# Altium PCB top_board_rev10.PcbDoc
Units mm, origin at the board's own origin, x right, y up, seen from the top; angles counter-clockwise.
Board outline 109 x 70 mm, 4 copper layers (Top Layer, +12V, -12V, Bottom Layer), stack 0.603 mm thick; 89 components, 70 nets, 330 pads, 126 vias.
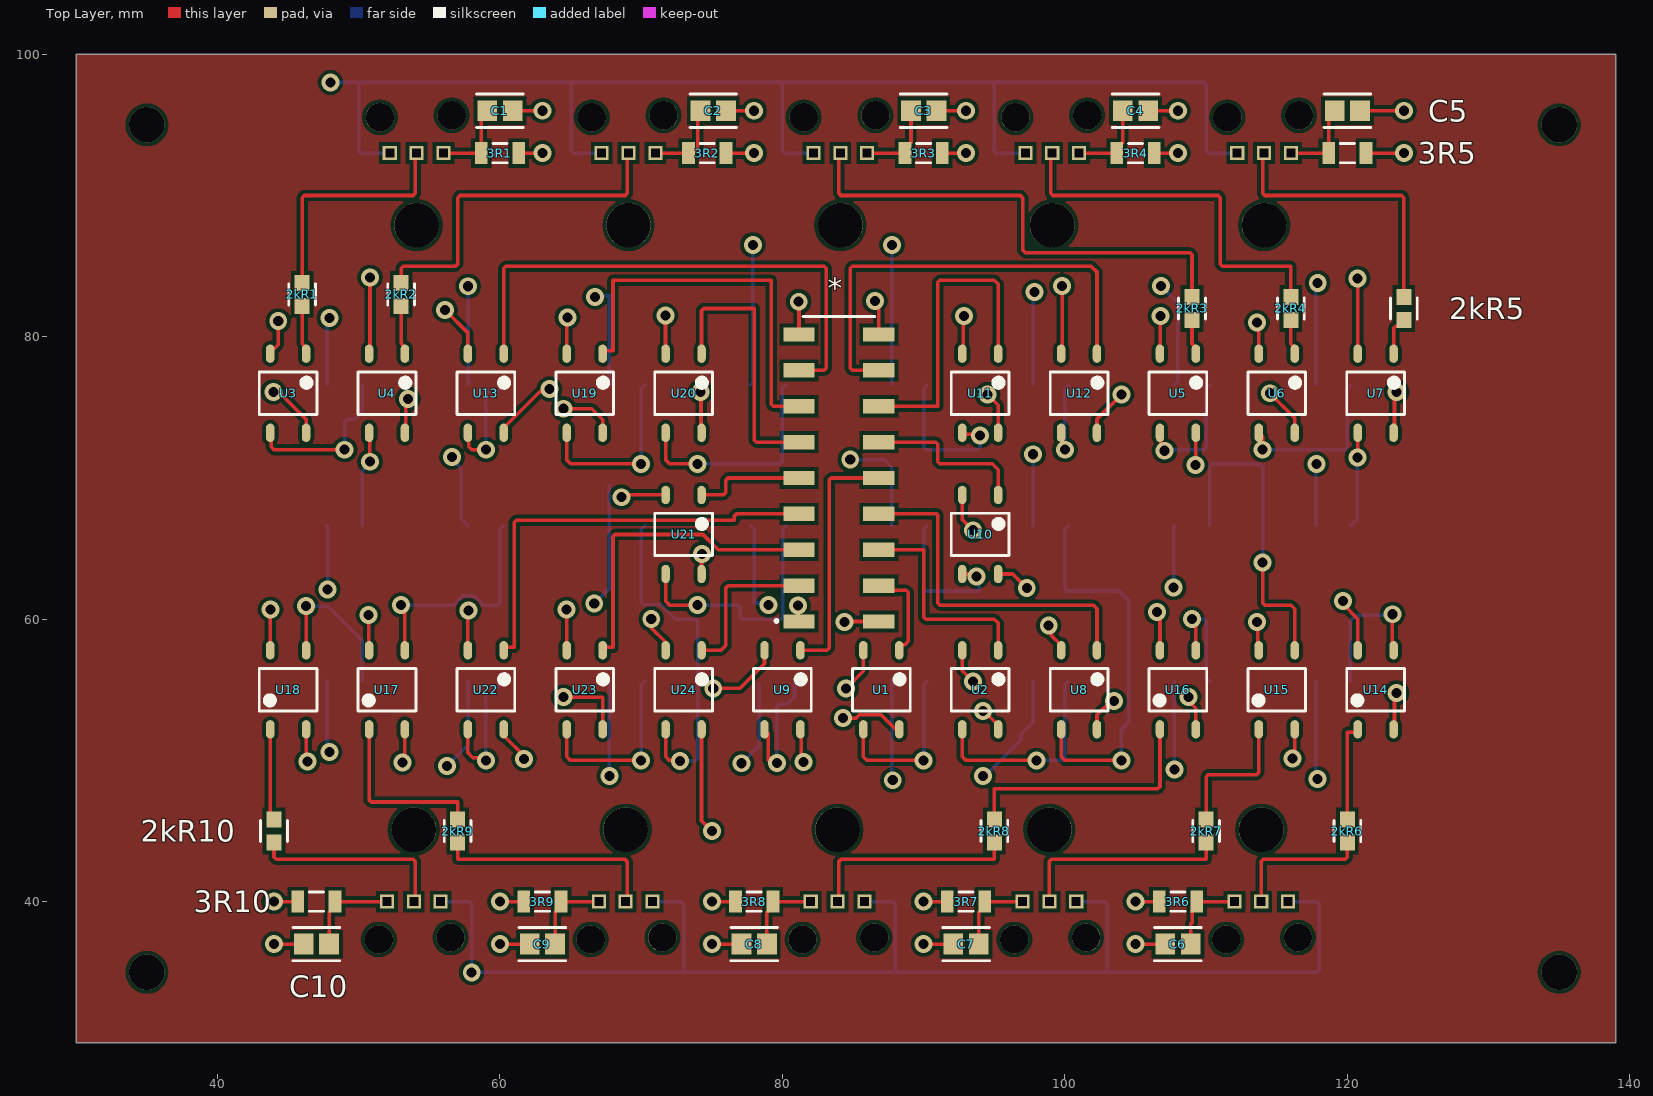
[diagram p0: Top Layer view]
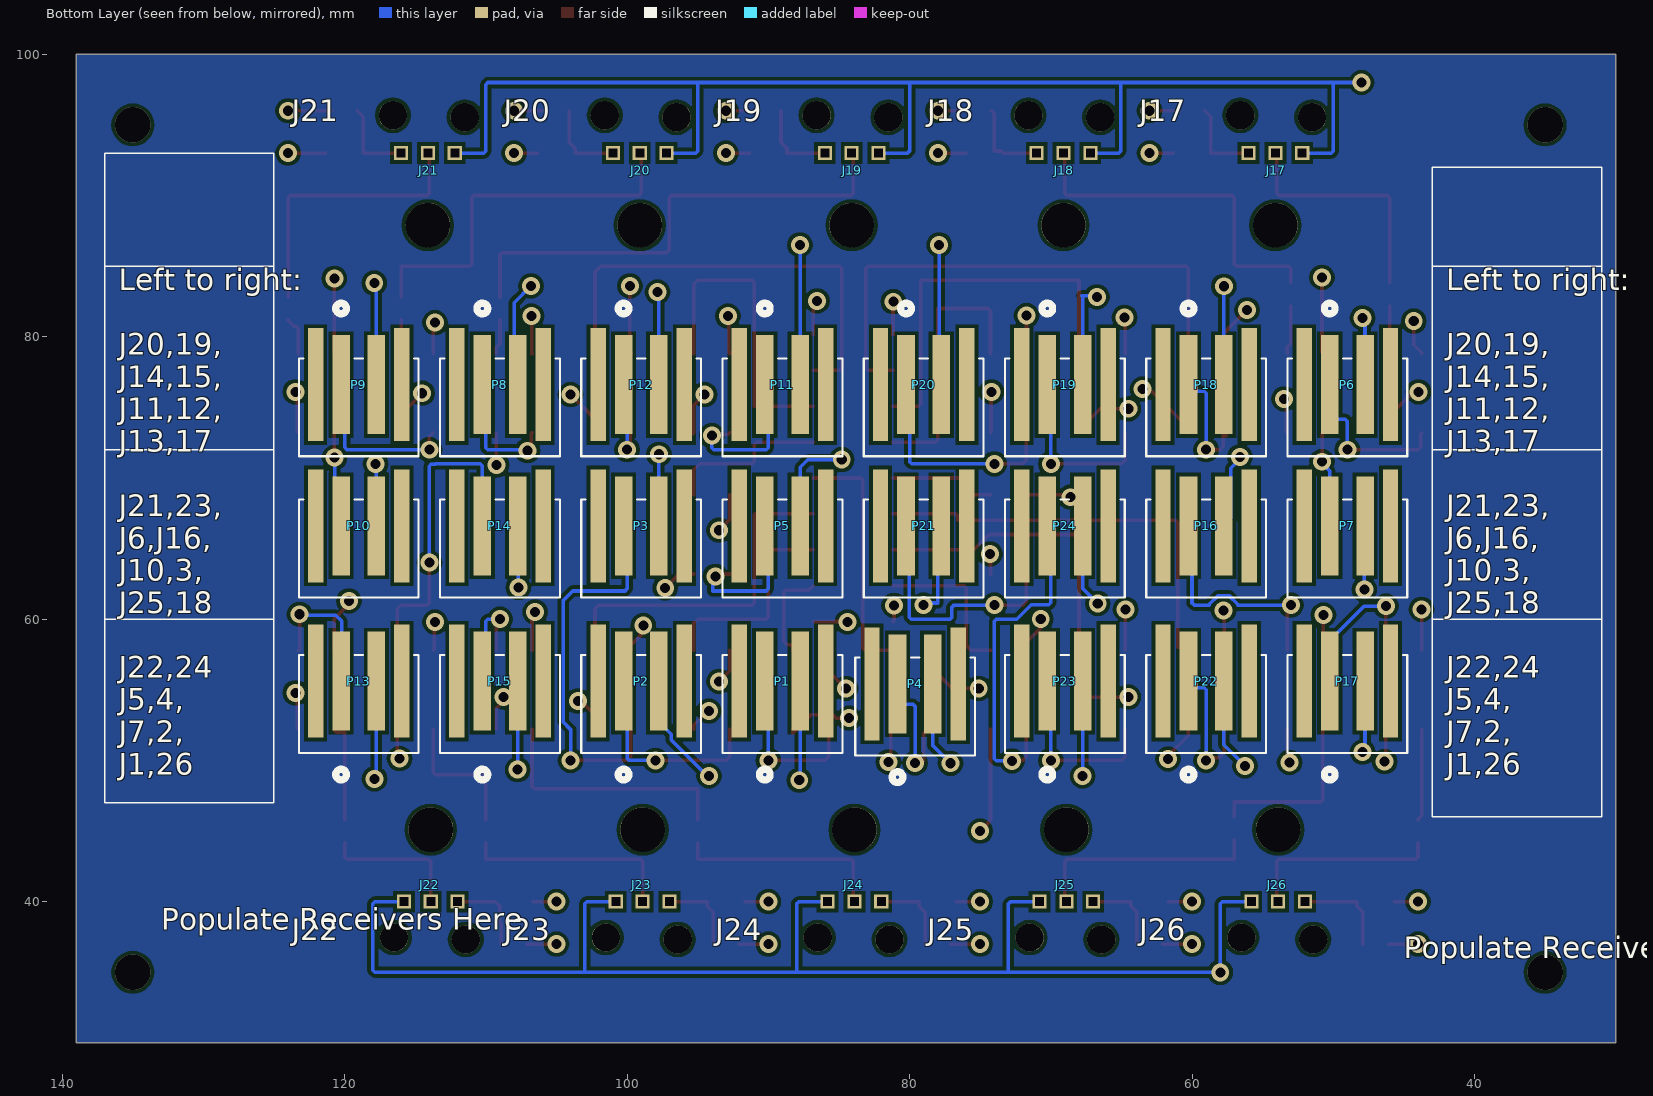
[diagram p1: Bottom Layer view, seen from below]
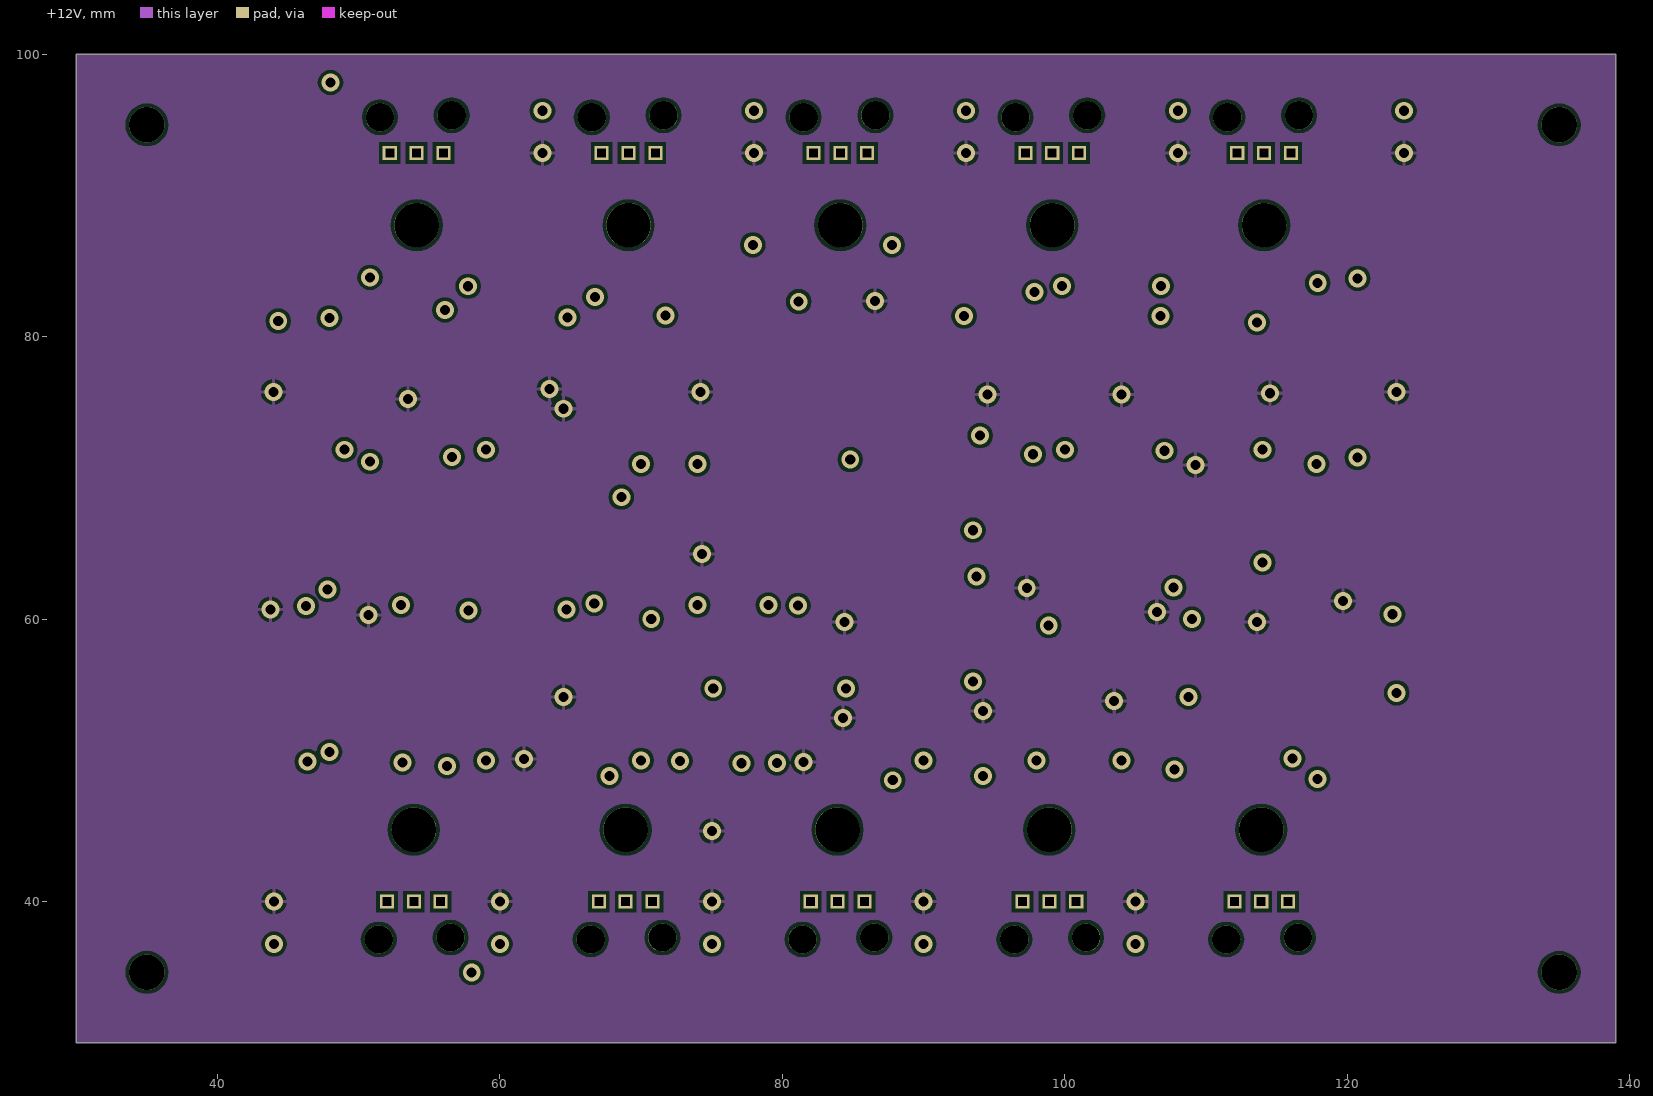
[diagram p2: +12V]
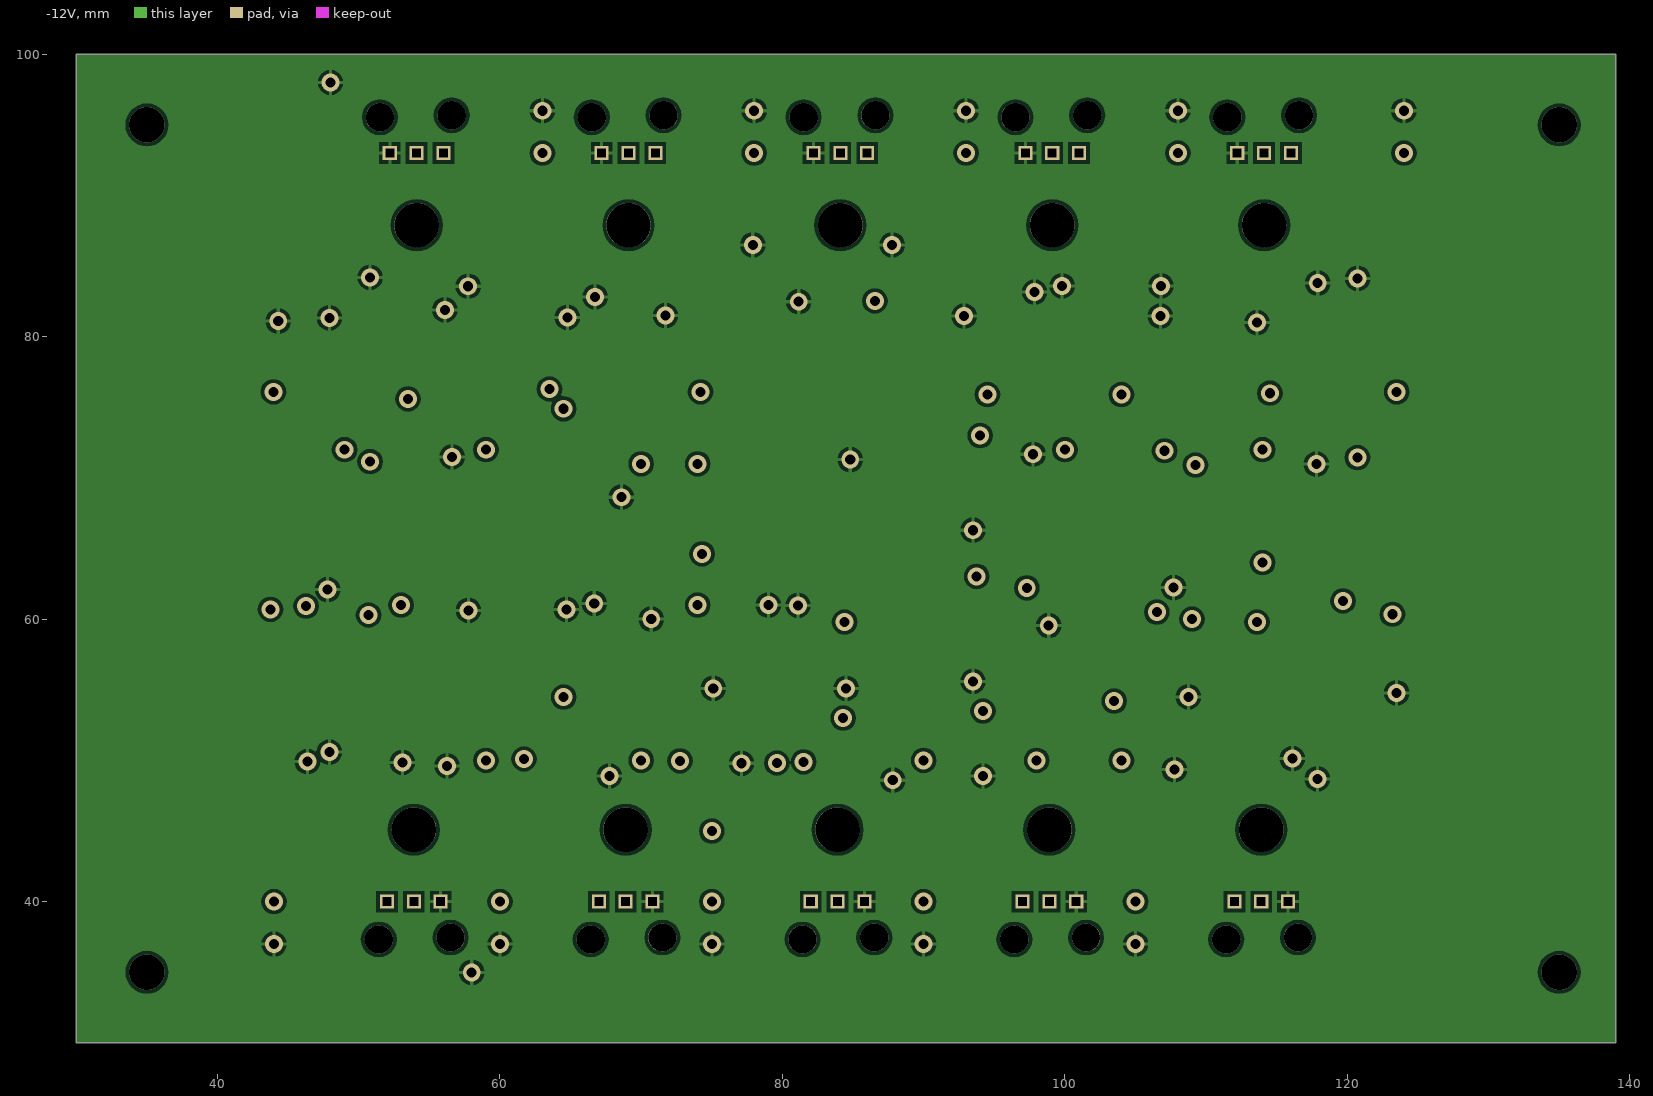
[diagram p3: -12V]
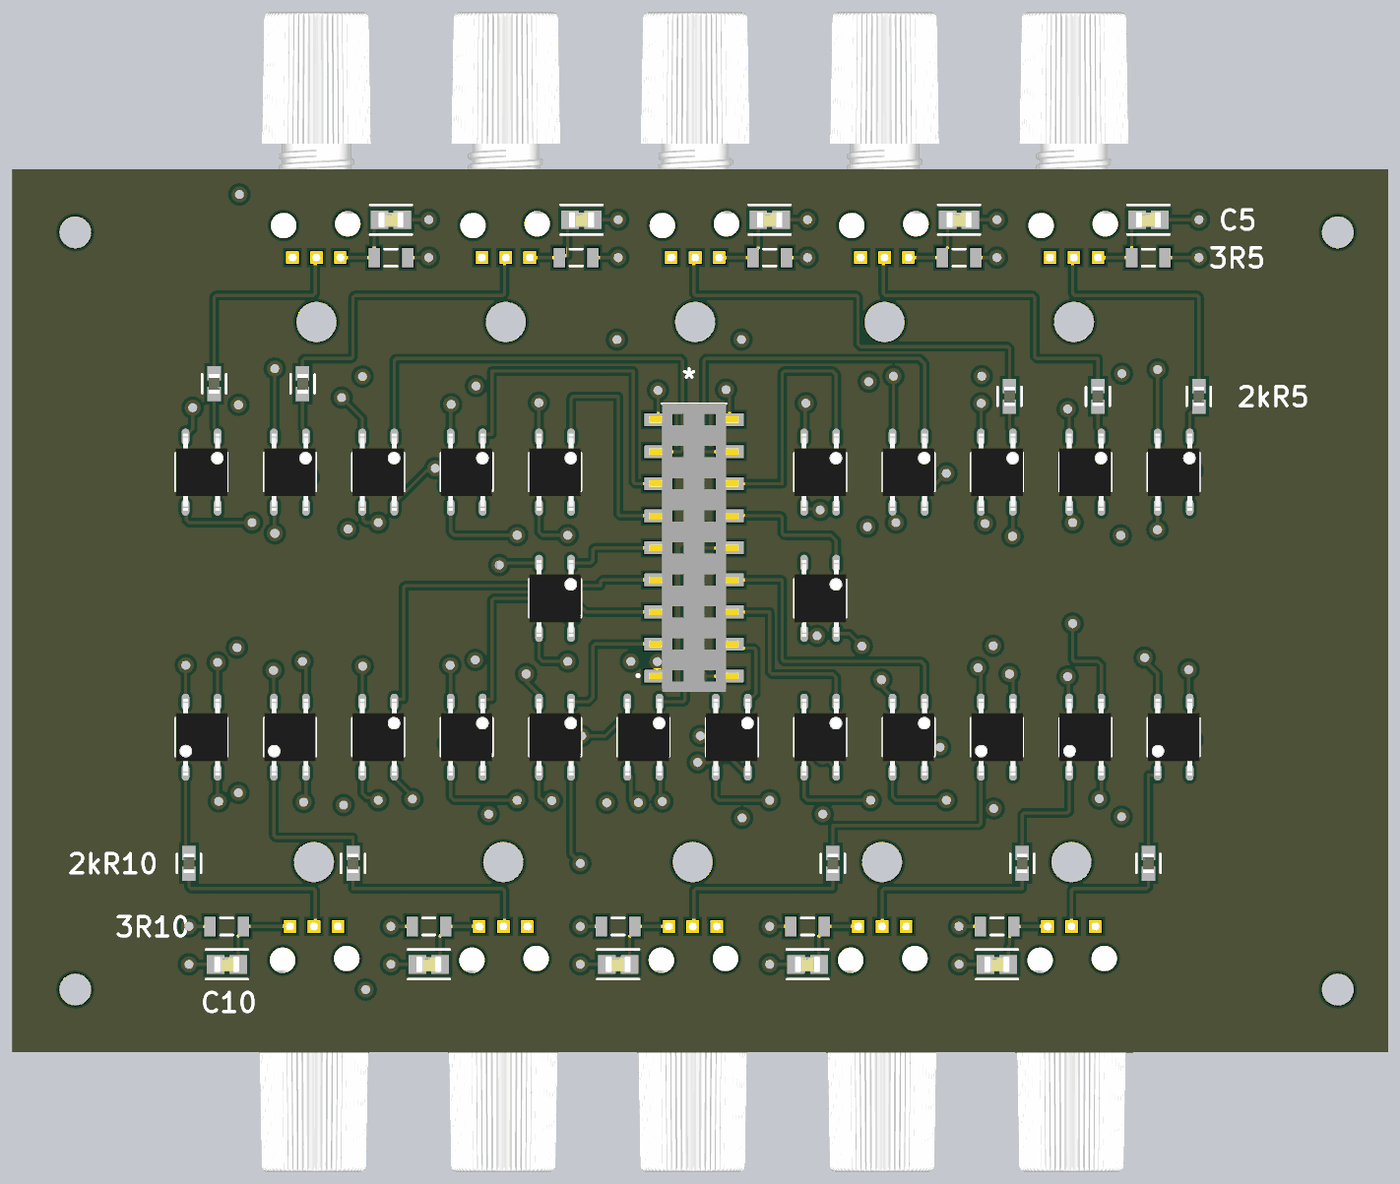
[diagram p4: 3D render of the assembled board from above, using the file's embedded part models]
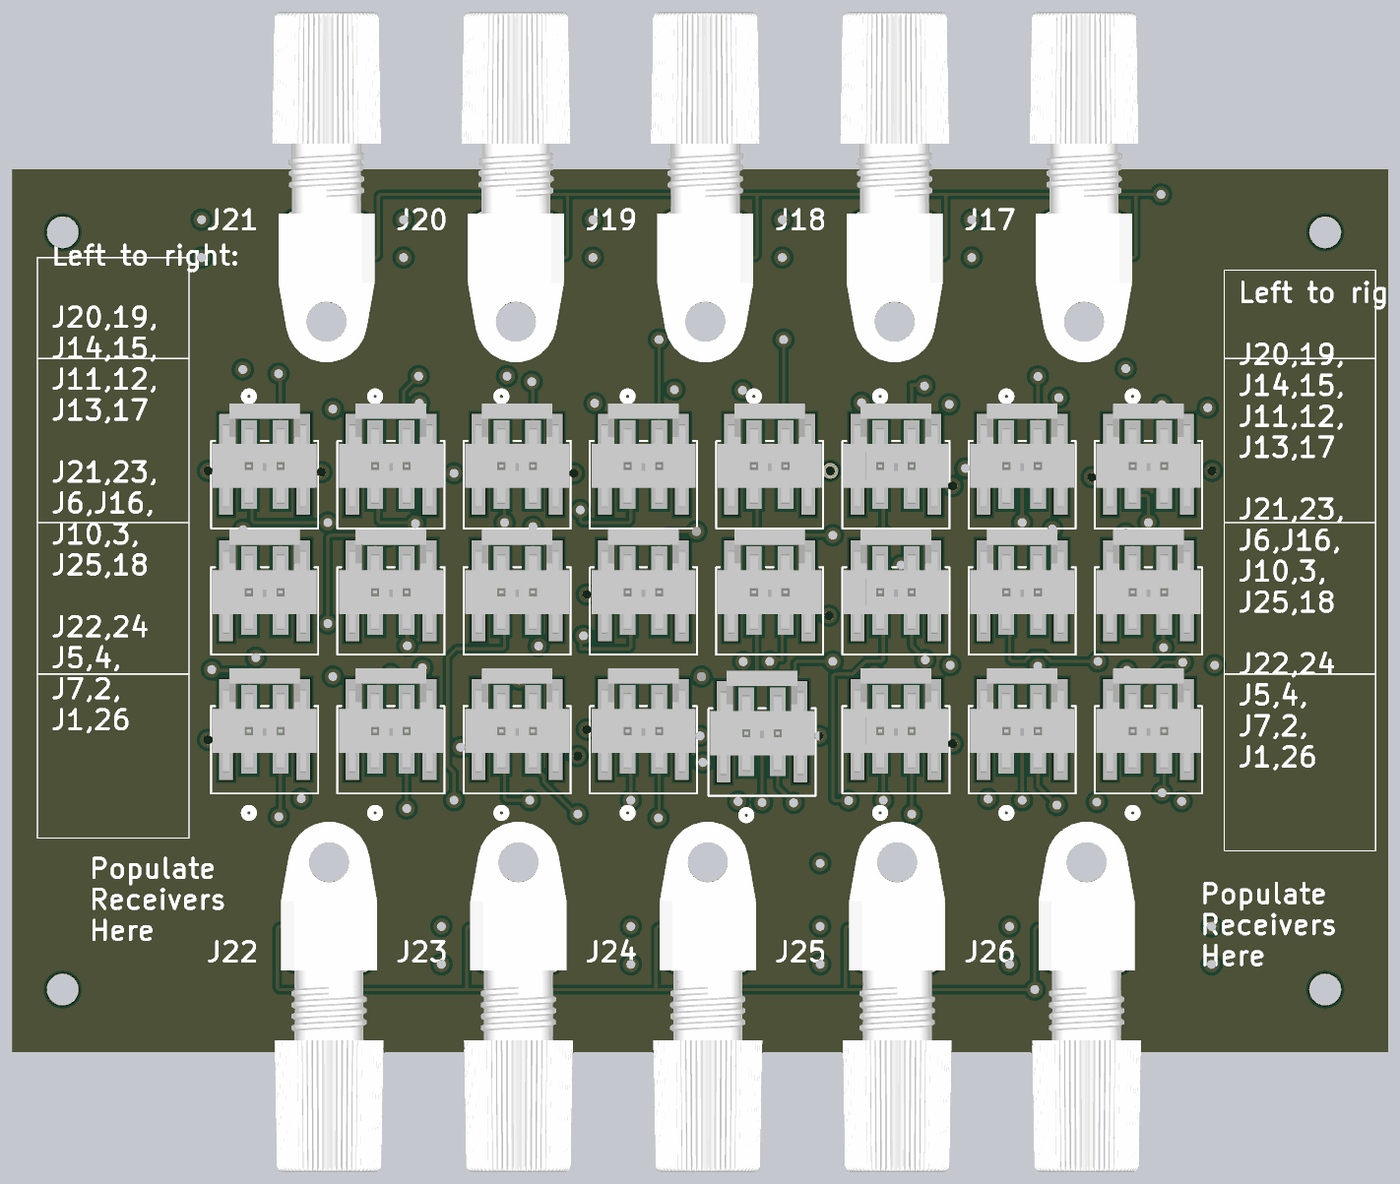
[diagram p5: 3D render of the assembled board from below, using the file's embedded part models]

## Layer stack, top to bottom
Top Solder: solder mask 0.0102, Solder Resist, Dk 3.5
Top Layer: signal copper 0.035
Dielectric 2: prepreg 0.0711, PP-006, Dk 4.1
+12V: signal copper 0.0356
Dielectric 1: dielectric 0.32, FR-4, Dk 4.8
-12V: signal copper 0.0356
Dielectric 3: prepreg 0.0711, PP-006, Dk 4.1
Bottom Layer: signal copper 0.035
Bottom Solder: solder mask 0.0102, Solder Resist, Dk 3.5

## Board outline
30,30 30,100 139,100 139,30

## Design rules (kind name [scope] priority, off if disabled: settings)
Clearance [All] p1: gap=0.254 ignorepadtopadclearanceinfootprint=FALSE except(0: Arc-Hole Track-Hole SMDPad-Hole THPad-Hole Via-Hole Fill-Hole Poly-Hole Region-Hole Text-Hole)
HoleSize [All] p1: absolutevalues=TRUE maxlimit=4 minlimit=0.025 maxpercent=80.000 minpercent=20.000
PolygonConnect [All] p1: connectstyle=Relief reliefconductorwidth=0.254 reliefentries=4 polygonreliefangle="90 Angle" airgapwidth=0.254
RoomDefinition top_schem_rev9 [InComponentClass('top_schem_rev9')] p1: confinementstyle=ConfineIn formatcopy=TRUE lockcomponents=FALSE outline 21,13 148,13 148,117 21,117
RoutingVias [All] p1: holewidth=0.711 width=1.27 viastyle="Through Hole" minholewidth=0.711 minwidth=1.27 maxholewidth=0.711 maxwidth=1.27
SolderMaskExpansion [All] p1: expansion=0.102 istentingtop=FALSE
Width [All] p1: maxlimit=0.254 minlimit=0.254 preferedwidth=0.254
29 further rules are at their usual default settings.

## Components (designator, comment, footprint, x,y, rotation, side; value= is the part's Value field where it differs from the comment)
2kR1 "CRCW06031K80FKEA" 2kOhm 46,83 r270 top
2kR2 "CRCW06031K80FKEA" 2kOhm 53,83 r270 top
2kR3 "CRCW06031K80FKEA" 2kOhm 109,82 r270 top
2kR4 "CRCW06031K80FKEA" 2kOhm 116,82 r270 top
2kR5 "CRCW06031K80FKEA" 2kOhm 124,82 r270 top
2kR6 "CRCW06031K80FKEA" 2kOhm 120,45 r90 top
2kR7 "CRCW06031K80FKEA" 2kOhm 110,45 r90 top
2kR8 "CRCW06031K80FKEA" 2kOhm 95,45 r90 top
2kR9 "CRCW06031K80FKEA" 2kOhm 57,45 r90 top
2kR10 "CRCW06031K80FKEA" 2kOhm 44,45 r90 top
3R1 "ERJ-2BQJR30X" "03 Ohm" 60,93 r180 top
3R2 "ERJ-2BQJR30X" "03 Ohm" 74.675,93 r180 top
3R3 "ERJ-2BQJR30X" "03 Ohm" 90,93 r180 top
3R4 "ERJ-2BQJR30X" "03 Ohm" 105,93 r180 top
3R5 "ERJ-2BQJR30X" "03 Ohm" 120,93 r180 top
3R6 "ERJ-2BQJR30X" "03 Ohm" 108,40 r180 top
3R7 "ERJ-2BQJR30X" "03 Ohm" 93,40 r180 top
3R8 "ERJ-2BQJR30X" "03 Ohm" 78,40 r180 top
3R9 "ERJ-2BQJR30X" "03 Ohm" 63,40 r180 top
3R10 "ERJ-2BQJR30X" "03 Ohm" 47,40 r180 top
* "18-pin-receiver" 18-PIN-RECEIVER 84,70 r270 top
C1 "C0805C104K5RACTU" 100nF 60,96 r0 top
C2 "C0805C104K5RACTU" 100nF 75.099,96 r0 top
C3 "C0805C104K5RACTU" 100nF 90,96 r0 top
C4 "C0805C104K5RACTU" 100nF 105,96 r0 top
C5 "C0805C104K5RACTU" 100nF 120,96 r0 top
C6 "C0805C104K5RACTU" 100nF 108,37 r0 top
C7 "C0805C104K5RACTU" 100nF 93,37 r0 top
C8 "C0805C104K5RACTU" 100nF 78,37 r0 top
C9 "C0805C104K5RACTU" 100nF 63,37 r0 top
C10 "C0805C104K5RACTU" 100nF 47,37 r0 top
J17 "IF-D95T" IF-D95 56,93 r180 bottom
J18 "IF-D95T" IF-D95 71,93 r180 bottom
J19 "IF-D95T" IF-D95 86,93 r180 bottom
J20 "IF-D95T" IF-D95 101,93 r180 bottom
J21 "IF-D95T" IF-D95 116,93 r180 bottom
J22 "IF-D95T" IF-D95 112,40 r0 bottom
J23 "IF-D95T" IF-D95 97,40 r0 bottom
J24 "IF-D95T" IF-D95 82,40 r0 bottom
J25 "IF-D95T" IF-D95 67,40 r0 bottom
J26 "IF-D95T" IF-D95 52,40 r0 bottom
P1 "1054311102" CONN_1054311102_MOL 89,54 r0 bottom
P2 "1054311102" CONN_1054311102_MOL 99,54 r0 bottom
P3 "1054311102" CONN_1054311102_MOL 99,65 r0 bottom
P4 "1054311102" CONN_1054311102_MOL 79.604,53.819 r0 bottom
P5 "1054311102" CONN_1054311102_MOL 89,65 r0 bottom
P6 "1054311102" CONN_1054311102_MOL 49,75 r0 bottom
P7 "1054311102" CONN_1054311102_MOL 49,65 r0 bottom
P8 "1054311102" CONN_1054311102_MOL 109,75 r0 bottom
P9 "1054311102" CONN_1054311102_MOL 119,75 r0 bottom
P10 "1054311102" CONN_1054311102_MOL 119,65 r0 bottom
P11 "1054311102" CONN_1054311102_MOL 89,75 r0 bottom
P12 "1054311102" CONN_1054311102_MOL 99,75 r0 bottom
P13 "1054311102" CONN_1054311102_MOL 119,54 r0 bottom
P14 "1054311102" CONN_1054311102_MOL 109,65 r0 bottom
P15 "1054311102" CONN_1054311102_MOL 109,54 r0 bottom
P16 "1054311102" CONN_1054311102_MOL 59,65 r0 bottom
P17 "1054311102" CONN_1054311102_MOL 49,54 r0 bottom
P18 "1054311102" CONN_1054311102_MOL 59,75 r0 bottom
P19 "1054311102" CONN_1054311102_MOL 69,75 r0 bottom
P20 "1054311102" CONN_1054311102_MOL 79,75 r0 bottom
P21 "1054311102" CONN_1054311102_MOL 79,65 r0 bottom
P22 "1054311102" CONN_1054311102_MOL 59,54 r0 bottom
P23 "1054311102" CONN_1054311102_MOL 69,54 r0 bottom
P24 "1054311102" CONN_1054311102_MOL 69,65 r0 bottom
U1 "Solid state relay" CPC1002N 87,55 r270 top
U2 "Solid state relay" CPC1002N 94,55 r270 top
U3 "Solid state relay" CPC1002N 45,76 r270 top
U4 "Solid state relay" CPC1002N 52,76 r270 top
U5 "Solid state relay" CPC1002N 108,76 r270 top
U6 "Solid state relay" CPC1002N 115,76 r270 top
U7 "Solid state relay" CPC1002N 122,76 r270 top
U8 "Solid state relay" CPC1002N 101,55 r270 top
U9 "Solid state relay" CPC1002N 80,55 r270 top
U10 "Solid state relay" CPC1002N 94,66 r270 top
U11 "Solid state relay" CPC1002N 94,76 r270 top
U12 "Solid state relay" CPC1002N 101,76 r270 top
U13 "Solid state relay" CPC1002N 59,76 r270 top
U14 "Solid state relay" CPC1002N 122,55 r90 top
U15 "Solid state relay" CPC1002N 115,55 r90 top
U16 "Solid state relay" CPC1002N 108,55 r90 top
U17 "Solid state relay" CPC1002N 52,55 r90 top
U18 "Solid state relay" CPC1002N 45,55 r90 top
U19 "Solid state relay" CPC1002N 66,76 r270 top
U20 "Solid state relay" CPC1002N 73,76 r270 top
U21 "Solid state relay" CPC1002N 73,66 r270 top
U22 "Solid state relay" CPC1002N 59,55 r270 top
U23 "Solid state relay" CPC1002N 66,55 r270 top
U24 "Solid state relay" CPC1002N 73,55 r270 top

## Footprints (in the part's own frame and the unit in brackets; to place one, negate y for a bottom-side part, rotate by r counter-clockwise, add the part's x,y. Pads: shape width x height; smd on the part's side, far side on the other; paste and mask are expansions set on the pad)
2kOhm [mm]
  rect 1.135x1.062 smd paste+0 mask+0: 1(-0.815,0) 2(0.815,0)
  silkscreen extent -0.75,-0.95 0.75,0.95, body extent -1.88,-1.03 1.88,1.03, height 0.25
"03 Ohm" [mm]
  rect 0.9x1.55 smd: 1(-1.325,0) 2(1.325,0)
  silkscreen extent -0.5,-0.67 0.5,0.67, body extent -1.63,-0.82 1.62,0.82, height 0.7
18-PIN-RECEIVER [mm]
  rect 1.02x2.22 smd: 01(10.16,-2.825) 02(10.16,2.825) 03(7.62,-2.825) 04(7.62,2.825) 05(5.08,-2.825) 06(5.08,2.825) 07(2.54,-2.825) 08(2.54,2.825) 09(0,-2.825) 10(0,2.825) 11(-2.54,-2.825) 12(-2.54,2.825) 13(-5.08,-2.825) 14(-5.08,2.825) 15(-7.62,-2.825) 16(-7.62,2.825) 17(-10.16,-2.825) 18(-10.16,2.825)
  silkscreen extent -11.43,-4.52 10.22,2.54, body extent -11.43,-3.52 11.43,3.52, height 7.43
100nF [mil]
  rect 55x58 smd paste+0 mask+0: 1(-35.46,0) 2(35.46,0)
  silkscreen extent -65,-46 65,46, body extent -85,-50 85,50, height 10
CONN_1054311102_MOL [mil]
  rect 49x276 smd paste+0 mask+0: 1(49.21,-63.38) 2(-49.21,-63.38)
  rect 43x315 smd: 3(-120.28,-63.38) 4(120.28,-63.38)
  silkscreen extent -167,-136 167,212, body extent -162,-254 162,71, height 440
CPC1002N [mm] "Solid-State Relay"
  oval 1.3x0.6 smd paste+0 mask+0: 1(-2.8,1.27) 2(-2.8,-1.27) 3(2.8,-1.27) 4(2.8,1.27)
  silkscreen extent -1.5,-2.04 1.5,2.04, body extent -3.55,-2.25 3.55,2.25, height 0.25
IF-D95 [mm]
  rect 1x1 hole 0.6 square: 1(0,0) 2(1.9,0) 3(3.8,0)
  round 2 hole 2: 4(-0.58,2.675) 4(4.5,2.54)
  round 3.15 hole 3.15: 4(1.9,-5.1)
  body extent -2.42,-8.3 6.22,19.44, height 11.3

## Part data
2kR1 2kR2 2kR3 2kR4 2kR5 2kR6 2kR7 2kR8 2kR9 2kR10: "Res Thick Film 0603 1.8K Ohm 1% 1/10W ±100ppm/°C Molded SMD Paper T/R", Case Code (Imperial)=0603, Case Code (Metric)=1608, Manufacturer=Vishay, Max Operating Temperature=155°C, Max Power Dissipation=100mW, Min Operating Temperature=-55°C, Package Quantity=5000, Resistance=1.8kR, Resistance Tolerance=1%, Resistor Type="Thick Film", Temperature Coefficient=100ppm/°C, Voltage Rating=75V, Case/Package=0603, Category="Chip SMD Resistors", ComponentLink1Description=https://datasheet.ciiva.com/11809/0900766b80d98afc-11809198.pdf?src-supplier=RSComponents, ComponentLink1URL=https://datasheet.ciiva.com/11809/0900766b80d98afc-11809198.pdf?src-supplier=RSComponents, ComponentLink2Description=https://datasheet.ciiva.com/2559/dcrcwe3-2559458.pdf?src-supplier=Digi-Key, ComponentLink2URL=https://datasheet.ciiva.com/2559/dcrcwe3-2559458.pdf?src-supplier=Digi-Key, ComponentLink3Description=https://datasheet.ciiva.com/2559/dcrcwe3-2559459.pdf?src-supplier=Digi-Key, ComponentLink3URL=https://datasheet.ciiva.com/2559/dcrcwe3-2559459.pdf?src-supplier=Digi-Key, ComponentLink4Description=https://datasheet.ciiva.com/2559/dcrcwe3-2559460.pdf?src-supplier=Digi-Key, ComponentLink4URL=https://datasheet.ciiva.com/2559/dcrcwe3-2559460.pdf?src-supplier=Digi-Key, ComponentLink5Description=https://datasheet.ciiva.com/3257/dcrcwe3-3257191.pdf?src-supplier=Avnet, ComponentLink5URL=https://datasheet.ciiva.com/3257/dcrcwe3-3257191.pdf?src-supplier=Avnet, ComponentLink6Description=https://datasheet.ciiva.com/5547/dcrcwe3-109170-5547689.pdf?src-supplier=Mouser, ComponentLink6URL=https://datasheet.ciiva.com/5547/dcrcwe3-109170-5547689.pdf?src-supplier=Mouser, ComponentLink7Description=https://datasheet.ciiva.com/26314/fld-crcw-e3-data-en-26314680.pdf?src-supplier=Distrelec, ComponentLink7URL=https://datasheet.ciiva.com/26314/fld-crcw-e3-data-en-26314680.pdf?src-supplier=Distrelec, ComponentLink8Description=https://datasheet.ciiva.com/22872/70201119-22872444.pdf?src-supplier=Allied+Electronics, ComponentLink8URL=https://datasheet.ciiva.com/22872/70201119-22872444.pdf?src-supplier=Allied+Electronics, ComponentLink9Description=https://datasheet.ciiva.com/7673/1533075-7673143.pdf?src-supplier=Element14, ComponentLink9URL=https://datasheet.ciiva.com/7673/1533075-7673143.pdf?src-supplier=Element14, Construction=Rectangular, Contact Plating=Tin, Depth=0.85mm, Features="Automotive AEC-Q200", Height=0.45mm, Lead Free="Lead Free", Length=1.55mm, Manufacturer Part Number=CRCW06031K80FKEA, Military Standard=Not, Number of Terminations=2, Packaging="Tape and Reel", Power Rating=100mW, Pricing 1="50=0.06500, 500=0.06000, 1000=0.05600, 2000=0.05200, 4000=0.04800 (USD)", Radiation Hardening=No, REACH SVHC=Unknown, RoHS=Yes, RoHS Compliant=Yes, Series=CRCW, Size Code=0603, Stock 1=7900, Supplier 1=RSComponents, Technology="THICK FILM", Termination=SMD/SMT, Tolerance=1%, Voltage Rating (DC)=75V, Weight=7.1E-05oz, Width=0.033inch
3R1 3R2 3R3 3R4 3R5 3R6 3R7 3R8 3R9 3R10: "RES 0.3 OHM 5% 1/6W 0402", Case Code (Imperial)=0402, Case Code (Metric)=1005, Manufacturer=Panasonic, Max Operating Temperature=125°C, Max Power Dissipation=167mW, Min Operating Temperature=-55°C, Resistance=300mR, Resistor Type="Thick Film", Supplier Part Number 1=P17347CT-ND, Temperature Coefficient=250ppm/°C, Tolerance=5%, Case/Package=0402, Category="Chip SMD Resistors", ComponentLink1Description=http://www.mouser.com/ds/2/315/AOA0000C295-1109214.pdf?src-supplier=Mouser, ComponentLink1URL=http://www.mouser.com/ds/2/315/AOA0000C295-1109214.pdf?src-supplier=Mouser, ComponentLink2Description=https://industrial.panasonic.com/cdbs/www-data/pdf/RDN0000/AOA0000C313.pdf?src-supplier=Digi-Key, ComponentLink2URL=https://industrial.panasonic.com/cdbs/www-data/pdf/RDN0000/AOA0000C313.pdf?src-supplier=Digi-Key, Features="Automotive AEC-Q200", Height=0.016inch, Length=0.039inch, Manufacturer Part Number=ERJ-2BQJR30X, Number of Terminations=2, Packaging="Tape and Reel", Pricing 1="1=0.21000, 10=0.17600, 25=0.12800, 50=0.09280, 100=0.06880, 250=0.05280, 500=0.04160, 1000=0.02880, 5000=0.02400 (USD)", RoHS=Yes, Stock 1=18282, Supplier 1=Digi-Key, Width=0.02inch
C1 C2 C3 C4 C5 C6 C7 C8 C9 C10: "Cap Ceramic 0.1uF 50V X7R 10% SMD 2.0 x 1.2 mm 125 C Paper T/R", Capacitance=100nF, Case Code (Imperial)=0805, Case Code (Metric)=2012, Dielectric=X7R, Dielectric Material=Ceramic, Manufacturer=KEMET, Max Operating Temperature=125°C, Min Operating Temperature=-55°C, Package Quantity=4000, Supplier Part Number 1=399-1170-1-ND, Tolerance=10%, Voltage=500V, Voltage Rating=50V, Case/Package=0805, Category="Ceramic Capacitors", ComponentLink1Description=https://datasheet.ciiva.com/28682/1851736-28682232.pdf?src-supplier=Element14, ComponentLink1URL=https://datasheet.ciiva.com/28682/1851736-28682232.pdf?src-supplier=Element14, ComponentLink2Description=https://datasheet.ciiva.com/14589/70095383-14589048.pdf?src-supplier=Allied+Electronics, ComponentLink2URL=https://datasheet.ciiva.com/14589/70095383-14589048.pdf?src-supplier=Allied+Electronics, ComponentLink3Description=https://datasheet.ciiva.com/32431/slceramic-chip-condensers-e-32431755.pdf?src-supplier=Distrelec, ComponentLink3URL=https://datasheet.ciiva.com/32431/slceramic-chip-condensers-e-32431755.pdf?src-supplier=Distrelec, ComponentLink4Description=https://datasheet.ciiva.com/18410/70095383-18410815.pdf?src-supplier=Allied+Electronics, ComponentLink4URL=https://datasheet.ciiva.com/18410/70095383-18410815.pdf?src-supplier=Allied+Electronics, Construction=Flat, Contact Plating=Tin,Matte, Depth=1.25mm, Height=0.9mm, Lead Pitch=0.75mm, Length=2mm, Manufacturer Part Number=C0805C104K5RACTU, Mount="Surface Mount,PCB", Number of Pins=2, Packaging="Tape and Reel", Pricing 1="1=0.15000, 10=0.11000, 50=0.06220, 100=0.05150, 500=0.03612, 1000=0.02991 (USD)", Radiation Hardening=No, REACH SVHC="No SVHC", RoHS=Yes, RoHS Compliant=Yes, Series=C0805C, Stock 1=2447786, Supplier 1=Digi-Key, Termination=SMD/SMT, Thickness=0.035inch, Voltage Rating (DC)=50V, Width=1.2mm
J17 J18 J19 J20 J21 J22 J23 J24 J25 J26: "DETECTOR PHOTOLOGIC TTL/CMOS", Manufacturer="Industrial Fiber Optics", Operating Supply Current=6mA, Package Quantity=50, Supplier Part Number 1=FB123-ND, Category="Fiber Optic Cables", ComponentLink1Description=https://datasheet.ciiva.com/2106/ifd95-2106550.pdf?src-supplier=Digi-Key, ComponentLink1URL=https://datasheet.ciiva.com/2106/ifd95-2106550.pdf?src-supplier=Digi-Key, Data Rate=125Kbps, Lead Free="Contains Lead", Manufacturer Part Number=IF-D95T, Rise Time=70ns, RoHS=No, Supplier 1=Digi-Key
P1 P2 P3 P4 P5 P6 P7 P8 P9 P10 P11 P12 P13 P14 P15 P16 P17 P18 P19 P20 P21 P22 P23 P24: "Nano-Fit Vertical Header, Surface Mount, 2.50mm Pitch, Single Row, 2 Circuits, 0.76 u00B5m Tin (Sn) Plating, Black,...", Manufacturer=Molex, Supplier Part Number 1=WM26073CT-ND, Category=Connectors, Manufacturer Part Number=1054311102, Pricing 1="1=2.05000, 10=1.85700, 100=1.59160 (USD)", RoHS=No, Stock 1=1192, Supplier 1=Digi-Key
U1 U2 U3 U4 U5 U6 U7 U8 U9 U10 U11 U12 U13 U14 U15 U16 U17 U18 U19 U20 U21 U22 U23 U24: library part CPC1002N

## Via types
v1: diameter 1.27, hole 0.711, Top Layer to Bottom Layer, tented both sides, 121 vias
v2: diameter 2.5, hole 2.5, Top Layer to Bottom Layer, 4 vias
v3: diameter 1.27, hole 0.711, Top Layer to Bottom Layer, 1 vias

## Nets (pads, with @x,y where several pads share a name; then routed paths per layer and width w, separated by ;. In a path a pad name is that pad's centre, name@x,y a point inside that pad or via, vN(x,y) a via of type N, cw(c..) or ccw(c..) an arc to the next point about the centre after c; other vN are vias at no path point)
+12V: 3R1.1 3R2.1 3R3.1 3R4.1 3R5.1 3R6.2 3R7.2 3R8.2 3R9.2 3R10.2 *.02 *.18 U1.4 U2.4 U3.4 U4.4 U5.4 U6.4 U7.4 U8.4 U9.4 U10.4 U11.4 U12.4 U13.4 U14.4 U15.4 U16.4 U17.4 U18.4 U19.4 U20.4 U21.4 U22.4 U23.4 U24.4 | length 101.6
  Top Layer w0.254: U18.4 43.73,60.68 v1(43.751,60.701) ; v1(43.962,76.1) 44.324,76.1 46.27,74.154 U3.4 ; v1(44,40) 3R10.2 ; v1(50.7,60.3) 50.715,60.285 50.715,57.815 U17.4 ; U4.4 53.336,73.266 53.336,75.446 v1(53.49,75.6) ; v1(60,40) 3R9.2 ; U22.4 60.27,51.756 61.7,50.326 v1(61.7,50.1) ; U13.4 60.27,73.55 62.826,76.106 63.306,76.106 v1(63.5,76.3) ; 3R1.1 v1(63,93) ; v1(64.51,54.481) 67.288,54.481 67.288,52.218 U23.4 ; v1(64.51,74.9) 66.5,74.9 67.27,74.13 U19.4 ; v3(74.2,76.1) 74.235,76.065 74.235,73.235 U20.4 ; U24.4 74.27,45.73 v1(75,45) ; U21.4 74.27,64.581 v1(74.312,64.623) ; v1(75,40) 3R8.2 ; 3R2.1 v1(78,93) ; U9.4 81.336,52.134 81.336,50.064 v1(81.5,49.9) ; v1(84.3,53) 85.217,53 85.448,53.231 86.983,53.231 88.27,51.944 U1.4 ; v1(84.4,59.8) 84.44,59.84 *.02 ; v1(86.546,82.533) 86.825,82.254 *.18 ; v1(90,40) 3R7.2 ; 3R3.1 v1(93,93) ; v1(94.202,53.498) 94.262,53.498 95.27,52.49 U2.4 ; v1(94.51,75.9) 95.27,75.14 U11.4 U11.4@95.321,73.149 ; U10.4 96.316,63.2 v1(97.3,62.216) ; U8.4 102.27,53.231 103.239,54.2 v1(103.49,54.2) ; U12.4 102.27,74.17 v1(104,75.9) ; v1(105,40) 3R6.2 ; 3R4.1 v1(108,93) ; v1(106.505,60.499) 106.505,60.224 106.73,59.999 U16.4 ; v1(109.236,70.913) 109.253,70.93 109.253,73.183 U5.4 ; v1(113.6,59.8) 113.665,59.735 113.665,57.865 U15.4 ; v1(114.51,76) 116.27,74.24 U6.4 ; v1(119.7,61.3) 119.7,61.05 120.746,60.004 120.746,59.958 120.73,59.942 U14.4 ; 3R5.1 v1(124,93) ; U7.4 123.336,73.266 123.336,75.946 v1(123.49,76.1)
+12V1: 3R1.2 C1.1 J17.1 | length 5.9
  Top Layer w0.254: J17.1 3R1.2 58.675,95.576 C1.1
+12V2: 3R2.2 C2.1 J18.1 | length 6
  Top Layer w0.254: J18.1 3R2.2 73.499,93.149 74,93.149 74,95.802 C2.1
+12V3: 3R3.2 C3.1 J19.1 | length 5.9
  Top Layer w0.254: J19.1 3R3.2 88.675,93.325 89.099,93.749 C3.1
+12V4: 3R4.2 C4.1 J20.1 | length 5.9
  Top Layer w0.254: J20.1 3R4.2 103.675,93.325 104.099,93.749 C4.1
+12V5: 3R5.2 C5.1 J21.1 | length 5.9
  Top Layer w0.254: J21.1 3R5.2 118.675,95.576 C5.1
+12V6: 3R6.1 C6.2 J22.1 | length 5.9
  Top Layer w0.254: C6.2 108.901,38.43 109.002,38.531 109.002,39.677 3R6.1 J22.1
+12V7: 3R7.1 C7.2 J23.1 | length 5.9
  Top Layer w0.254: C7.2 93.901,39.251 94.325,39.675 3R7.1 J23.1
+12V8: 3R8.1 C8.2 J24.1 | length 5.9
  Top Layer w0.254: C8.2 78.901,39.251 79.325,39.675 3R8.1 J24.1
+12V9: 3R9.1 C9.2 J25.1 | length 5.9
  Top Layer w0.254: C9.2 63.901,39.251 64.325,39.675 3R9.1 J25.1
+12V10: 3R10.1 C10.2 J26.1 | length 6.9
  Top Layer w0.254: C10.2 47.901,39.251 48.325,39.675 3R10.1 J26.1
BIAS_1: P1.1 U1.3 | length 12
  Top Layer w0.254: U1.3 85.73,50.27 86,50 v1(90,50)
  Bottom Layer w0.254: v1(90,50) 90,55.36 P1.1
BIAS_2: P2.1 U2.3 | length 14.9
  Top Layer w0.254: U2.3 92.73,50.27 93,50 v1(98,50)
  Bottom Layer w0.254: v1(98,50) 99.851,50 100,50.149 100,55.36 P2.1
BIAS_3: P3.1 U8.3 | length 27.3
  Top Layer w0.254: U8.3 99.73,50.27 100,50 v1(104,50)
  Bottom Layer w0.254: P3.1 100,66.36 100,62.149 100.149,62 103.851,62 104.506,61.345 104.506,52.701 104,52.195 v1(104,50)
BIAS_4: P4.1 U9.3 | length 8.8
  Top Layer w0.254: U9.3 79,51.93 v1@79,50
  Bottom Layer w0.254: v1(79.604,49.819) 79.604,53.819 79.752,53.968 80.358,53.968 80.854,54.463 P4.1
BIAS_5: P5.1 U10.3 | length 10.8
  Top Layer w0.254: U10.3 93.581,63.2 v1(93.753,63.028)
  Bottom Layer w0.254: P5.1 90,66.36 90,62.149 90.149,62 93.936,62 93.947,62.012 93.947,62.833 v1(93.753,63.028)
BIAS_6: P11.1 U11.3 | length 10.9
  Top Layer w0.254: U11.3 92.83,73.1 93.9,73.1 v1(94,73)
  Bottom Layer w0.254: P11.1 90,76.36 90,72.149 90.149,72 93.851,72 94,72.149 v1(94,73)
BIAS_7: P12.1 U12.3 | length 6
  Top Layer w0.254: U12.3 99.796,73.134 99.796,72.479 100,72.275 v1(100,72)
  Bottom Layer w0.254: v1(100,72) 100,76.36 P12.1
BIAS_8: P18.1 U13.3 | length 8.1
  Top Layer w0.254: U13.3@57.57,73 57.73,73.16 U13.3 57.796,73.134 57.796,72.204 58,72 v1(59,72)
  Bottom Layer w0.254: v1(59,72) 59,76 59.149,76.149 59.789,76.149 P18.1
BIAS_9: P19.1 U19.3 | length 13
  Top Layer w0.254: U19.3 64.73,71.27 65,71 69.996,71 v1(70,71.004)
  Bottom Layer w0.254: v1(70,71.004) 70,76.36 P19.1
BIAS_10: P20.1 U20.3 | length 15.9
  Top Layer w0.254: U20.3 71.73,71.27 72,71 v1(74,71)
  Bottom Layer w0.254: v1(74,71) 79.851,71 80,71.149 80,76.36 P20.1
BIAS_11: P21.1 U21.3 | length 17.8
  Top Layer w0.254: U21.3 71.73,61.27 72,61 v1(74,61)
  Bottom Layer w0.254: v1(74,61) 76.851,61 77,60.851 77,60.149 77.165,59.984 79.851,59.984 80.016,60.149 80.016,66.376 P21.1
BIAS_12: P22.1 U22.3 | length 9.7
  Top Layer w0.254: U22.3 57.73,50.545 58.081,50.194 58.806,50.194 v1(59,50)
  Bottom Layer w0.254: v1(59,50) 59,55 59.149,55.149 59.789,55.149 P22.1
BIAS_13: P23.1 U23.3 | length 13
  Top Layer w0.254: U23.3 64.73,50.27 65,50 v1(70,50)
  Bottom Layer w0.254: v1(70,50) 70,55.36 P23.1
BIAS_14: P24.1 U24.3 | length 24.2
  Top Layer w0.254: U24.3 71.73,50.27 72,50 72.723,50 v1(72.749,49.974)
  Bottom Layer w0.254: P24.1 70,66.36 70,61.169 70.149,61.02 71.38,61.02 72.4,60 73.563,60 73.579,59.984 73.867,59.984 74,59.851 74,50.123 73.851,49.974 v1(72.749,49.974)
BIAS_15: P6.1 U3.3 | length 11.8
  Top Layer w0.254: U3.3 43.796,73.134 43.796,72.204 44,72 v1(49,72)
  Bottom Layer w0.254: v1(49,72) 49,74 49.149,74.149 49.755,74.149 50.25,74.644 P6.1
BIAS_16: P7.1 U4.3 | length 6.8
  Top Layer w0.254: U4.3 50.767,73.163 50.767,71.187 v1(50.803,71.151)
  Bottom Layer w0.254: P7.1 50.25,70.496 50.803,71.049 v1(50.803,71.151)
BIAS_17: P8.1 U5.3 | length 9
  Top Layer w0.254: U5.3 106.796,73.134 106.796,72.467 107.061,72.202 v1(107.061,71.927)
  Bottom Layer w0.254: v1(107.061,71.927) 107.134,72 109.851,72 110,72.149 110,76.36 P8.1
BIAS_18: P9.1 U6.3 | length 11.9
  Top Layer w0.254: U6.3 114,72.93 v1(114,72)
  Bottom Layer w0.254: v1(114,72) 119.835,72 120,72.165 120,76.36 P9.1
BIAS_19: P10.1 U7.3 | length 6.8
  Top Layer w0.254: v1(120.711,71.439) 120.72,71.448 120.72,73.19 U7.3
  Bottom Layer w0.254: P10.1 120.711,67.071 v1(120.711,71.439)
BIAS_20: P13.1 U14.3 | length 10.1
  Top Layer w0.254: v1(123.188,60.351) 123.188,57.882 U14.3
  Bottom Layer w0.254: P13.1 120.2,55.66 120.2,59.867 120.617,60.284 123.121,60.284 v1(123.188,60.351)
BIAS_21: P14.1 U15.3 | length 23.2
  Top Layer w0.254: v1(114,64) 114,61.149 114.149,61 116,61 116.27,60.73 U15.3
  Bottom Layer w0.254: P14.1 110.25,70.851 110.399,71 113.563,71 113.579,70.984 113.851,70.984 114,70.835 v1(114,64)
BIAS_22: P15.1 U16.3 | length 7.7
  Top Layer w0.254: v1(109,60) 109,59.725 109.27,59.455 U16.3
  Bottom Layer w0.254: v1(109,60) 109.851,60 110,59.851 110,55.86 P15.1
BIAS_23: P16.1 U17.3 | length 16.5
  Top Layer w0.254: v1(53,61) 53,60.725 53.27,60.455 U17.3
  Bottom Layer w0.254: v1(53,61) 56.752,61 56.752,61.049 57.347,61.644 58.189,61.644 58.784,61.049 58.784,61 59.851,61 60,61.149 60,66.36 P16.1
BIAS_24: P17.1 U18.3 | length 11
  Top Layer w0.254: U18.3 46.27,60.918 v1(46.276,60.924)
  Bottom Layer w0.254: v1(46.276,60.924) 47.819,60.924 50.25,58.493 P17.1
DIG_1: *.04 U1.1 | length 6.8
  Top Layer w0.254: *.04 87.15,62.055 88.751,62.055 88.9,61.907 88.9,58.43 88.673,58.203 88.43,58.203 88.27,58.043 U1.1
DIG_2: *.06 U2.1 | length 15.3
  Top Layer w0.254: *.06 89.98,64.92 90,64.9 90,60.149 90.149,60 95,60 95.27,59.73 U2.1
DIG_3: *.08 U8.1 | length 24.8
  Top Layer w0.254: *.08 90.94,67.46 91,67.4 91,61.149 91.149,61 102,61 102.27,60.73 U8.1
DIG_4: *.10 U9.1 | length 17.9
  Top Layer w0.254: U9.1@81.27,58.15 U9.1 83.151,57.8 83.3,57.949 83.3,69.851 83.449,70 *.10
DIG_5: *.12 U10.1 | length 11.8
  Top Layer w0.254: *.12 90.851,72.54 91,72.391 91,71.149 91.149,71 94.851,71 95.27,70.581 U10.1
DIG_6: *.14 U11.1 | length 22.3
  Top Layer w0.254: *.14 91,75.08 91,83.851 91.149,84 95,84 95.27,83.73 U11.1
DIG_7: *.16 U12.1 | length 32.7
  Top Layer w0.254: *.16 84.949,77.62 84.8,77.769 84.8,84.851 84.949,85 101.851,85 102.27,84.581 U12.1
DIG_8: *.15 U13.1 | length 38.1
  Top Layer w0.254: U13.1 60.27,84.851 60.419,85 82.951,85 83.1,84.851 83.1,77.769 82.951,77.62 *.15
DIG_9: *.13 U19.1 | length 27.8
  Top Layer w0.254: U19.1 67.27,78.84 67.43,79 68,79 68,84 79.2,84 79.2,75.229 79.349,75.08 *.13
DIG_10: *.11 U20.1 | length 19.4
  Top Layer w0.254: U20.1 74.27,81.851 74.419,82 78,82 78,72.689 78.149,72.54 *.11
DIG_11: *.09 U21.1 | length 7.9
  Top Layer w0.254: U21.1 75.8,68.8 76,69 76,69.851 76.149,70 *.09
DIG_12: *.07 U22.1 | length 30.3
  Top Layer w0.254: U22.1 60.27,57.84 60.43,58 61,58 61,66.851 61.149,67 76.6,67 76.6,67.311 76.749,67.46 *.07
DIG_13: *.05 U23.1 | length 22.4
  Top Layer w0.254: U23.1 67.27,57.84 67.43,58 68,58 68,65.851 68.149,66 74.371,66 75.451,64.92 *.05
DIG_14: *.03 U24.1 | length 11.2
  Top Layer w0.254: U24.1 75.651,57.8 76,58.149 76,62.231 76.149,62.38 *.03
DIG_15: 2kR1.1 J17.2 | length 17.1
  Top Layer w0.254: 2kR1.1 46,89.851 46.149,90 53.851,90 54,90.149 54,92.9 J17.2
DIG_16: 2kR2.1 J18.2 | length 24.9
  Top Layer w0.254: 2kR2.1 53,84.851 53.149,85 56.851,85 57,85.149 57,89.851 57.149,90 68.851,90 69,90.149 69,92.9 J18.2
DIG_17: 2kR3.1 J19.2 | length 34.8
  Top Layer w0.254: J19.2 84,92.9 84,90.149 84.149,90 96.851,90 97,89.851 97,86.149 97.205,85.944 108.851,85.944 109,85.795 2kR3.1
DIG_18: 2kR4.1 J20.2 | length 27
  Top Layer w0.254: J20.2 99,92.9 99,90.149 99.149,90 110.851,90 111,89.851 111,85.149 111.149,85 116,85 2kR4.1
DIG_19: 2kR5.1 J21.2 | length 20.1
  Top Layer w0.254: J21.2 114,92.9 114,90.149 114.149,90 123.851,90 124,89.851 2kR5.1
DIG_20: 2kR6.1 J22.2 | length 10.1
  Top Layer w0.254: J22.2 113.9,42.851 114.049,43 119.851,43 120,43.149 2kR6.1
DIG_21: 2kR7.1 J23.2 | length 15.2
  Top Layer w0.254: J23.2 98.9,42.851 99.049,43 110,43 2kR7.1
DIG_22: 2kR8.1 J24.2 | length 15.1
  Top Layer w0.254: J24.2 84,40.1 84,42.851 84.149,43 95,43 2kR8.1
DIG_23: 2kR9.1 J25.2 | length 16.3
  Top Layer w0.254: 2kR9.1@57,44.369 57,43 68.851,43 69,42.851 69,40.1 J25.2
DIG_24: 2kR10.1 J26.2 | length 14.1
  Top Layer w0.254: 2kR10.1 44,43.149 44.149,43 53.851,43 54,42.851 54,40.1 J26.2
GND: *.01 *.17 C1.2 C2.2 C3.2 C4.2 C5.2 C6.1 C7.1 C8.1 C9.1 C10.1 J17.3 J18.3 J19.3 J20.3 J21.3 J22.3 J23.3 J24.3 J25.3 J26.3 P1.2 P2.2 P3.2 P4.2 P5.2 P6.2 P7.2 P8.2 P9.2 P10.2 P11.2 P12.2 P13.2 P14.2 P15.2 P16.2 P17.2 P18.2 P19.2 P20.2 P21.2 P22.2 P23.2 P24.2 U1.2 U2.2 U3.2 U4.2 U5.2 U6.2 U7.2 U8.2 U9.2 U10.2 U11.2 U12.2 U13.2 U14.2 U15.2 U16.2 U17.2 U18.2 U19.2 U20.2 U21.2 U22.2 U23.2 U24.2 | length 453.7
  Top Layer w0.254: U3.2 43.7,78.83 44.3,79.43 v1(44.3,81.1) ; v1(44,37) C10.1 ; U18.2 46.27,50.003 v1(46.362,49.911) ; U4.2 50.697,78.833 50.8,78.935 v1(50.8,84.2) ; v1(53.089,49.857) 53.27,50.038 U17.2 ; v1(56.1,81.9) 57.73,80.27 U13.2 ; U22.2 57.73,60.591 v1(57.768,60.628) ; v1(60,37) C9.1 ; C1.2 v1(63,96) ; v1(64.7,60.7) 64.73,60.67 U23.2 ; U19.2@64.715,78.815 U19.2 64.73,81.326 v1(64.774,81.37) ; v1(68.59,68.637) 68.753,68.8 U21.2 ; v1(70.712,60.004) 70.712,59.381 71.73,58.363 U24.2 ; v1(71.72,81.499) 71.72,78.81 U20.2 ; v1(75,37) C8.1 ; v1(75.1,55.1) 76.984,55.1 78.73,56.846 U9.2 ; C2.2 v1(78,96) ; v1(81.1,60.981) 81.1,59.915 *.01 ; v1(81.152,82.479) 81.175,82.457 *.17 ; v1(84.51,55.1) 85.73,56.32 U1.2 ; v1(90,37) C7.1 ; C3.2 v1(93,96) ; U11.2@92.665,78.865 U11.2 92.796,78.866 92.796,81.395 v1(92.862,81.46) ; U2.2 92.73,56.36 v1(93.49,55.6) ; U10.2 92.73,67.06 v1(93.49,66.3) ; v1(98.853,59.552) 99.048,59.358 99.048,58.832 99.73,58.15 U8.2 ; U12.2@99.715,78.815 U12.2 99.8,78.87 v1(99.8,83.6) ; v1(105,37) C6.1 ; C4.2 v1(108,96) ; U5.2 106.744,78.814 106.744,81.445 v1(106.757,81.459) ; v1(108.739,54.5) 108.739,54.225 109.27,53.694 U16.2 ; v1(113.6,81) 113.73,80.87 U6.2 ; v1(116.104,50.129) 116.27,50.295 U15.2 ; U7.2@120.715,78.815 U7.2 v1(120.73,84.13) ; C5.2 v1(124,96) ; U14.2 123.336,52.266 123.336,54.636 v1(123.49,54.789)
  Bottom Layer w0.254: P17.2 47.75,50.758 v1(47.919,50.589) ; P7.2 47.8,66.56 v1(47.8,62.1) ; P6.2 47.75,81.155 v1(47.927,81.332) ; v1(48,98) 50,98 ; J17.3 50.149,93 50,93.149 50,98 ; J26.3 57.851,40 58,39.851 v1(58,35) 73,35 ; v1(56.251,49.619) 57.75,51.118 P22.2 ; v1(56.613,71.491) 56.613,71.339 57.255,70.696 57.255,67.105 P16.2 ; v1(57.75,83.574) P18.2 P18.2@57.851,76.711 ; v1(66.676,61.116) 67.75,62.19 P24.2 P24.2@67.75,69.493 ; v1(66.734,82.821) 66.813,82.9 67.8,82.9 67.75,82.85 P19.2 P19.2@68,76.86 ; J18.3 65.193,93 65.044,93.149 65.044,98 ; v1(67.741,48.898) 67.75,48.907 P23.2 ; J25.3 72.851,40 73,39.851 73,35 ; v1(77.1,49.8) 78.354,51.054 P4.2 ; P21.2 78,66.36 78,61.149 78.851,61.149 v1(79,61) ; P20.2 77.9,76.76 v1(77.9,86.5) ; J19.3 80.149,93 80,93.149 80,98 ; v1(84.8,71.3) 87.2,71.3 87.75,70.75 P5.2 ; J24.3 87.851,40 88,39.851 88,35 ; P1.2 87.75,48.66 v1(87.811,48.599) ; P11.2 87.75,86.484 v1(87.767,86.5) ; v1(94.2,48.9) 94.321,48.9 96.872,51.452 96.872,51.849 97.75,52.727 P2.2 ; J20.3 95.149,93 95,93.149 95,98 ; v1(97.744,71.679) 97.75,71.673 P3.2 ; P12.2 97.75,83.067 v1(97.846,83.163) ; J23.3 102.851,40 103,39.851 103,35 ; v1(106.8,83.6) 108,82.4 108,76.86 P8.2 ; v1(107.703,62.237) 107.703,66.563 P14.2 ; v1(107.746,49.345) 107.732,49.345 107.75,49.364 P15.2 ; J21.3 110.149,93 110,93.149 110,97.851 109.851,98 95,98 ; J22.3 117.851,40 118,39.851 118,35.149 117.851,35 103,35 ; P13.2 117.75,48.827 v1(117.879,48.699) ; P10.2 117.75,71.011 117.805,71.066 v1(117.805,70.984) ; P9.2 117.75,83.65 v1(117.9,83.8) ; 50,98 65.044,98 ; 65.044,98 80,98 ; 73,35 88,35 ; 80,98 95,98 ; 88,35 103,35
RED_DIG_15: 2kR1.2 U3.1 | length 3.5
  Top Layer w0.254: 2kR1.2 46,79.514 46.27,79.244 U3.1
RED_DIG_16: 2kR2.2 U4.1 | length 3.5
  Top Layer w0.254: 2kR2.2 53,79.514 53.27,79.244 U4.1
RED_DIG_17: 2kR3.2 U5.1 | length 2.5
  Top Layer w0.254: 2kR3.2 109,79.514 109.27,79.244 U5.1
RED_DIG_18: 2kR4.2 U6.1 | length 2.5
  Top Layer w0.254: 2kR4.2 116,79.514 116.27,79.244 U6.1
RED_DIG_19: 2kR5.2 U7.1 | length 2.8
  Top Layer w0.254: U7.1 123.27,80.595 123.419,80.744 123.596,80.744 124,81.148 2kR5.2
RED_DIG_20: 2kR6.2 U14.1 | length 7
  Top Layer w0.254: 2kR6.2 120,52 120.57,52 120.73,52.16 U14.1
RED_DIG_21: 2kR7.2 U15.1 | length 9.9
  Top Layer w0.254: 2kR7.2 110,48.851 110.149,49 113.581,49 113.73,49.149 U15.1
RED_DIG_22: 2kR8.2 U16.1 | length 18
  Top Layer w0.254: 2kR8.2 95,48 106.581,48 106.73,48.149 U16.1
RED_DIG_23: 2kR9.2 U17.1 | length 12.4
  Top Layer w0.254: U17.1 50.73,47.205 50.879,47.056 57,47.056 2kR9.2@57,46
RED_DIG_24: 2kR10.2 U18.1 | length 6.5
  Top Layer w0.254: U18.1 43.73,46.085 2kR10.2
pads on no net: J17.4 J18.4 J19.4 J20.4 J21.4 J22.4 J23.4 J24.4 J25.4 J26.4 P1.3 P1.4 P2.3 P2.4 P3.3 P3.4 P4.3 P4.4 P5.3 P5.4 P6.3 P6.4 P7.3 P7.4 P8.3 P8.4 P9.3 P9.4 P10.3 P10.4 P11.3 P11.4 P12.3 P12.4 P13.3 P13.4 P14.3 P14.4 P15.3 P15.4 P16.3 P16.4 P17.3 P17.4 P18.3 P18.4 P19.3 P19.4 P20.3 P20.4 P21.3 P21.4 P22.3 P22.4 P23.3 P23.4 P24.3 P24.4
copper on no net:
  other v2: 35,35 135,35 35,95 135,95

## Polygon pours and split planes (outlines as drawn)
no net on Bottom Layer "Bottom" (solid, pour order 1): 30,30 30,100 139,100 139,30
+12V on +12V "+12V" (solid, pour order 2): 30,30 30,100 139,100 139,30
GND on -12V "-12V" (solid, pour order 3): 30,30 30,100 139,100 139,30
no net on Top Layer "Top" (solid, pour order 0): 30,30 30,100 139,100 139,30

## Silkscreen, mask and mechanical layers (free items; w line width, h text height)
Bottom Overlay:
  lines w0.1: 31,60 43,60 ; 31,72 43,72 ; 31,85 43,85 ; 125,60 137,60 ; 125,72 137,72 ; 125,85 137,85 ; 31,46 31,92 43,92 43,90 43,46 31,46 ; 125,47 125,93 137,93 137,91 137,47 125,47
  text "J17" at 63.746,95.254 h1.52
  text "J18" at 78.746,95.254 h1.52
  text "J19" at 93.746,95.254 h1.52
  text "J20" at 108.746,95.254 h1.52
  text "J21" at 123.746,95.254 h1.52
  text "Left to right: /  / J20,19,  / J14,15, / J11,12, / J13,17 /  / J21,23, / J6,J16, / J10,3, / J25,18 /  / J22,24 / J5,4, / J7,2, / J1,26" at 42,49 h1.52
  text "Left to right: /  / J20,19,  / J14,15, / J11,12, / J13,17 /  / J21,23, / J6,J16, / J10,3, / J25,18 /  / J22,24 / J5,4, / J7,2, / J1,26" at 136,49 h1.52
  text "Populate Receivers Here" at 133,38 h1.52
  text "J26" at 63.746,37.254 h1.52
  text "J25" at 78.746,37.254 h1.52
  text "J24" at 93.746,37.254 h1.52
  text "J23" at 108.746,37.254 h1.52
  text "J22" at 123.746,37.254 h1.52
  text "Populate Receivers Here" at 45,36 h1.52
Mechanical 0:
  lines w0: 30,30 139,30 ; 30,30 30,100 ; 30,30 139,30 ; 30,30 30,100 ; 30,100 139,100 ; 30,100 139,100 ; 139,30 139,100 ; 139,30 139,100